# Altium PCB NewBoard.PcbDoc
Units mm, origin at the board's own origin, x right, y up, seen from the top; angles counter-clockwise.
Board outline 132.08 x 179.6 mm, 2 copper layers (Top Layer, Bottom Layer); 63 components, 56 nets, 230 pads, 5 vias.
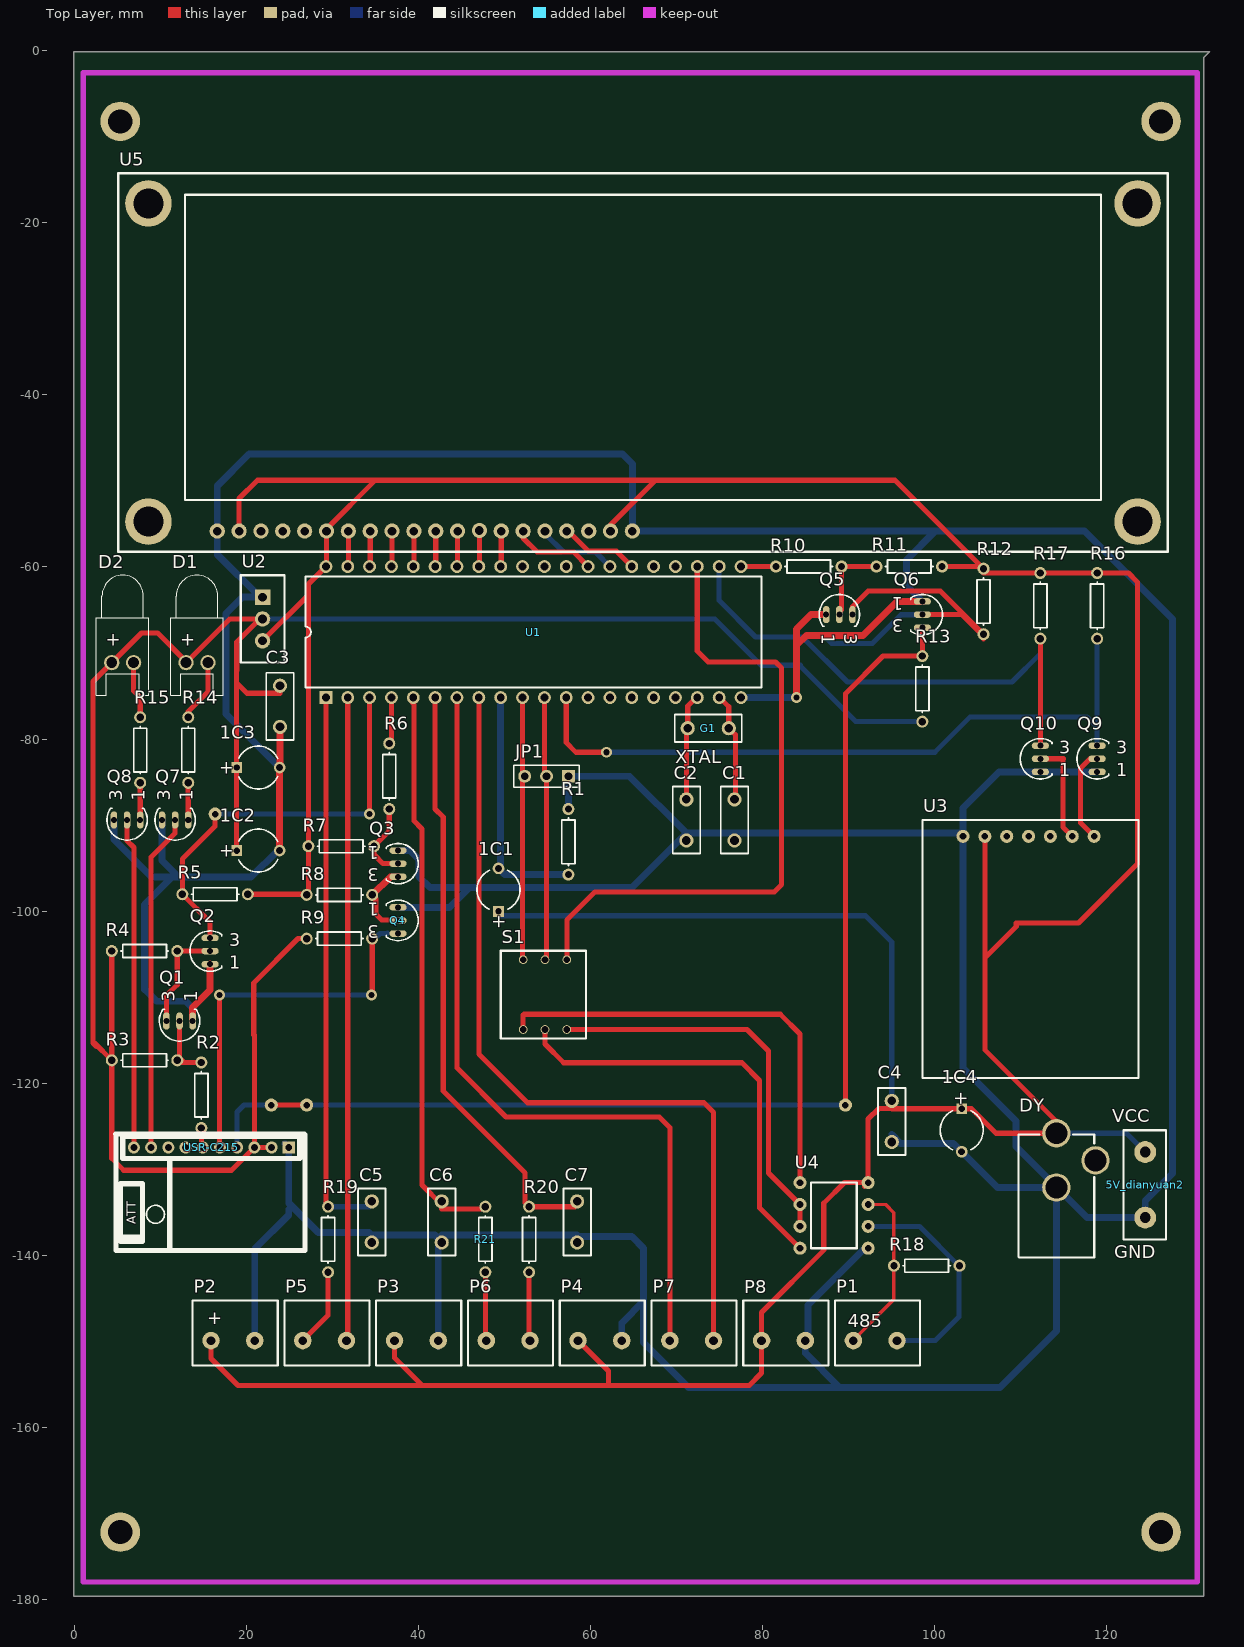
[diagram p0: Top Layer view]
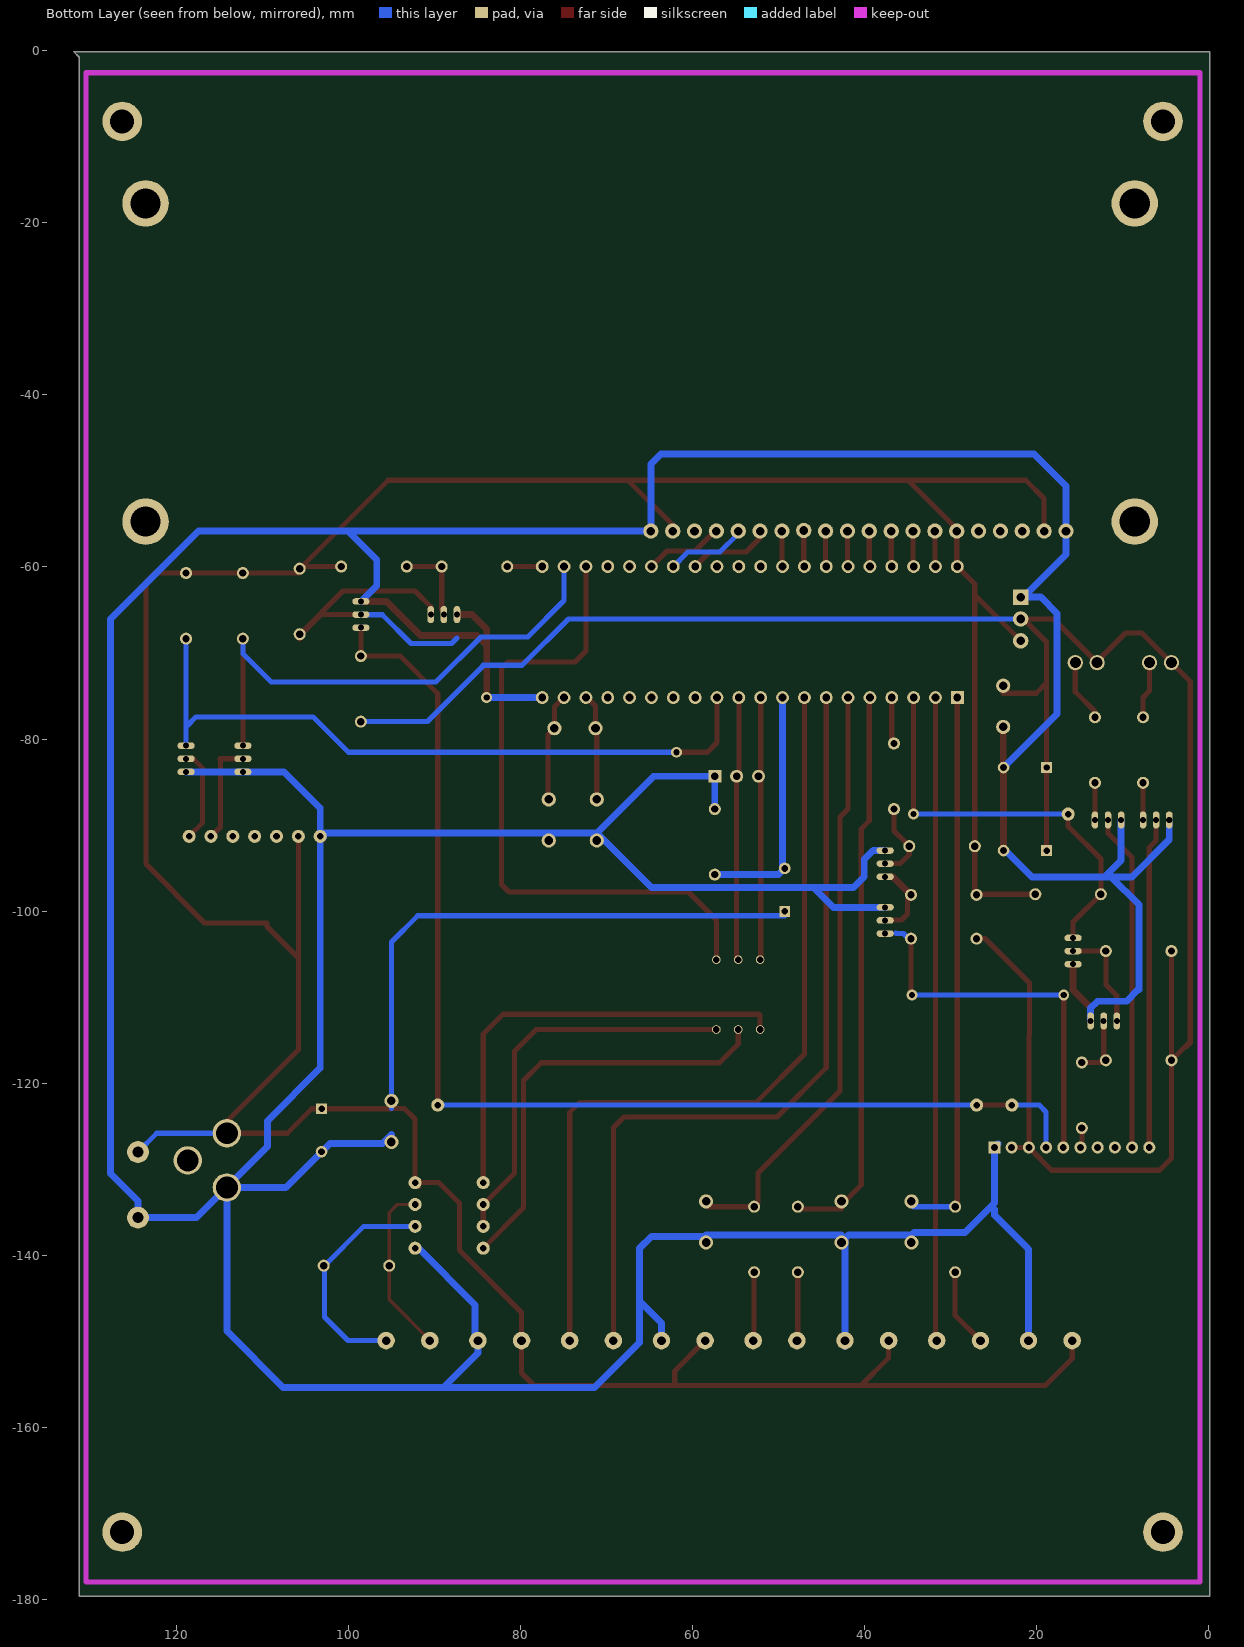
[diagram p1: Bottom Layer view, seen from below]

## Layer stack, top to bottom
Top Layer: signal copper 0.0356
Dielectric: core 0.32, FR-4, Dk 4.8
Bottom Layer: signal copper 0.0356

## Board outline
-0.127,-0.076 131.953,-0.076 131.293,-0.737 131.293,-179.68 -0.127,-179.68

## Design rules (kind name [scope] priority, off if disabled: settings)
Clearance [All] p1: gap=0.2
ComponentClearance [All] p1: gap=0.254 collisioncheckmode=3 verticalgap=0.254
HoleSize [All] p1: absolutevalues=TRUE maxlimit=4 minlimit=0.025 maxpercent=80.000 minpercent=20.000
PolygonConnect [All] p1: connectstyle=Relief reliefconductorwidth=0.254 reliefentries=4 polygonreliefangle="90 Angle"
RoutingVias [All] p1: holewidth=0.6 width=1 viastyle="Through Hole" minholewidth=0.711 minwidth=1.27 maxholewidth=0.711 maxwidth=1.27
SolderMaskExpansion [All] p1: expansion=0.102
TestPointUsage [All] p1: valid=0 allowmultiple=FALSE
Testpoint [All] p1: side=15 testpointundercomponent=TRUE minsize=1.016 maxsize=2.54 preferedsize=1.524 minholesize=0 maxholesize=1.016 preferedholesize=0.813 testpointgrid=0.025 style=1023 order=0123456789
Width [InNet('GND')] p1: maxlimit=0.8 minlimit=0.8 preferedwidth=0.8
17 further rules are at their usual default settings.

## Components (designator, comment, footprint, x,y, rotation, side; value= is the part's Value field where it differs from the comment)
1C1 "Cap Pol1" CAPPR5-5X5 49.276,-97.536 r90 top
1C2 "Cap Pol1" CAPPR5-5X5 21.336,-92.964 r0 top
1C3 "Cap Pol1" CAPPR5-5X5 21.336,-83.312 r0 top
1C4 "Cap Pol1" CAPPR5-5X5 103.124,-125.476 r270 top
5V_dianyuan2 "5V_dianyuan2" 5V_DIANYUAN2 124.46,-128.016 r0 top
C1 "30pF" CAPR5.08-7.8X3.2 76.708,-89.408 r90 top
C2 "104" CAPR5.08-7.8X3.2 71.12,-89.408 r90 top
C3 "104" CAPR5.08-7.8X3.2 23.876,-76.2 r270 top
C4 "104" CAPR5.08-7.8X3.2 94.996,-124.46 r270 top
C5 "104" CAPR5.08-7.8X3.2 34.544,-136.144 r270 top
C6 "104" CAPR5.08-7.8X3.2 42.672,-136.144 r270 top
C7 "104" CAPR5.08-7.8X3.2 58.42,-136.144 r270 top
D1 "LED0" LED-0 14.224,-71.12 r180 top
D2 "LED0" LED-0 5.588,-71.12 r180 top
DY "5V_yuankong" 5V_YUANKONG 109.728,-125.984 r0 top
G1 "XTAL" CAPR5.08-7.8X3.2 73.66,-78.74 r0 top
JP1 "Header 3" HDR1X3 57.404,-84.328 r180 top
P1 "duanzi-2" DUANZI-2 88.392,-145.288 r0 top
P2 "duanzi-2" DUANZI-2 13.716,-145.288 r0 top
P3 "duanzi-2" DUANZI-2 35.052,-145.288 r0 top
P4 "duanzi-2" DUANZI-2 56.388,-145.288 r0 top
P5 "duanzi-2" DUANZI-2 24.384,-145.288 r0 top
P6 "duanzi-2" DUANZI-2 45.72,-145.288 r0 top
P7 "duanzi-2" DUANZI-2 67.056,-145.288 r0 top
P8 "duanzi-2" DUANZI-2 77.724,-145.288 r0 top
Q1 "2N3904" TO-92A 12.192,-112.776 r90 top
Q2 "2N3904" TO-92A 15.748,-104.648 r0 top
Q3 "2N3904" TO-92A 37.592,-94.488 r180 top
Q4 "2N3904" TO-92A 37.592,-101.092 r180 top
Q5 "2N3904" TO-92A 88.9,-65.532 r270 top
Q6 "2N3904" TO-92A 98.552,-65.532 r180 top
Q7 "2N3906" TO-92A 11.684,-89.408 r90 top
Q8 "2N3906" TO-92A 6.096,-89.408 r90 top
Q9 "2N3904" TO-92A 118.872,-82.296 r0 top
Q10 "2N3904" TO-92A 112.268,-82.296 r0 top
R1 "10K" AXIAL-0.3 57.404,-91.948 r90 top
R2 "1K" AXIAL-0.3 14.732,-121.412 r90 top
R3 "1K" AXIAL-0.3 8.128,-117.348 r0 top
R4 "1K" AXIAL-0.3 8.128,-104.648 r0 top
R5 "1K" AXIAL-0.3 16.332,-98.044 r180 top
R6 "1K" AXIAL-0.3 36.576,-84.328 r270 top
R7 "1K" AXIAL-0.3 30.988,-92.456 r0 top
R8 "1K" AXIAL-0.3 30.785,-98.12 r0 top
R9 "1K" AXIAL-0.3 30.785,-103.2 r0 top
R10 "1K" AXIAL-0.3 85.344,-59.944 r0 top
R11 "1K" AXIAL-0.3 97.028,-59.944 r180 top
R12 "1K" AXIAL-0.3 105.664,-64.008 r270 top
R13 "1K" AXIAL-0.3 98.552,-74.168 r90 top
R14 "1K" AXIAL-0.3 13.208,-81.28 r270 top
R15 "1K" AXIAL-0.3 7.62,-81.28 r270 top
R16 "10K" AXIAL-0.3 118.872,-64.516 r270 top
R17 "10K" AXIAL-0.3 112.268,-64.516 r270 top
R18 "120R" AXIAL-0.3 99.06,-141.224 r0 top
R19 "1K" AXIAL-0.3 29.464,-138.176 r270 top
R20 "1K" AXIAL-0.3 52.832,-138.176 r270 top
R21 "1K" AXIAL-0.3 47.752,-138.176 r270 top
S1 "boma-3" BOMA-3 59.436,-114.3 r180 top
U1 "STC12" SOT129-1 53.34,-67.564 r0 top
U2 "LM1117" LM1117 21.844,-63.5 r270 top
U3 "315M_RECV" 315M_RECV 98.552,-89.408 r0 top
U4 "485_test" 485_TEST 84.328,-131.572 r0 top
U5 "16032zwa" 16032ZWA 5.08,-14.224 r0 top
USR-C215 "USR-C215" DIP2.0*1-10-M 24.892,-127.508 r90 top

## Footprints (in the part's own frame and the unit in brackets; to place one, negate y for a bottom-side part, rotate by r counter-clockwise, add the part's x,y. Pads: shape width x height; smd on the part's side, far side on the other; paste and mask are expansions set on the pad)
5V_DIANYUAN2 [mm]
  round 2.54 hole 1.27: 1(0,0) 2(0,-7.62)
  silkscreen extent -2.54,-10.16 2.41,2.54
5V_YUANKONG [mm]
  round 3.302 hole 2.54: 1(4.4,0.15) 2(4.4,-6.15) 3(8.95,-3)
  silkscreen extent 0,-14.3 8.8,0
315M_RECV [mil]
  round 60 hole 30: 1(186,-75) 2(286,-75) 3(386,-75) 4(486,-75) 5(586,-75) 6(686,-75) 7(786,-75)
  silkscreen extent 0,-1181 990,0
485_TEST [mil]
  round 60 hole 30: 1(0,0) 2(0,-100) 3(0,-200) 4(0,-300) 5(311.81,-300) 6(311.81,-200) 7(311.81,-100) 8(311.81,0)
  silkscreen extent 50,-300 260,0
16032ZWA [mm]
  round 1.778 hole 1: 1(59.76,-41.6) 2(57.22,-41.6) 3(54.68,-41.6) 4(52.14,-41.6) 5(49.6,-41.6) 6(47.06,-41.6) 7(44.52,-41.6) 8(41.98,-41.529) 9(39.44,-41.6) 10(36.9,-41.6) 11(34.36,-41.6) 12(31.82,-41.6) 13(29.28,-41.6) 14(26.74,-41.6) 15(24.2,-41.6) 16(21.66,-41.6) 17(19.12,-41.6) 18(16.58,-41.6) 19(14.04,-41.6) 20(11.5,-41.6)
  round 5.4 hole 3.5: 21(3.5,-3.5) 21(118.5,-40.5) 22(118.5,-3.5) 23(3.5,-40.5)
  silkscreen extent 0,-44 122,0
AXIAL-0.3 [mm] "Resistor; 2 Leads"
  round 1.4 hole 0.85: 1(-3.81,0) 2(3.81,0)
  silkscreen extent -2.77,-0.76 2.77,0.76
BOMA-3 [mm]
  round 1 hole 0.762: 1(2.215,-8.65) 2(4.755,-8.65) 3(7.295,-8.65) 4(7.295,-0.53) 5(4.755,-0.53) 6(2.215,-0.53)
  silkscreen extent 0,-9.69 9.9,0.51
CAPPR5-5X5 [mm]
  rect 1.25x1.25 hole 0.75: 1(-2.5,0)
  round 1.35 hole 0.8: 2(2.5,0)
  silkscreen extent -2.26,-2.5 2.27,2.5
CAPR5.08-7.8X3.2 [mm]
  round 1.65 hole 1: 1(-2.39,0) 2(2.39,0)
  silkscreen extent -3.9,-1.6 3.9,1.6
DIP2.0*1-10-M [mil]
  rect 55x55 hole 31.5: 1(1,0)
  round 55 hole 31.5: 2(1,78.74) 3(1,157.48) 4(1,236.22) 5(1,314.96) 6(1,393.7) 7(1,472.44) 8(1,551.18) 9(1,629.92) 10(1,708.66)
  silkscreen extent -470,-75 63,792
DUANZI-2 [mil]
  round 80 hole 40: 1(84.25,-183.07) 2(284.25,-183.07)
  silkscreen extent 0,-297 390,0
HDR1X3 [mm] "Connector; Header; 3 Position"
  rect 1.5x1.5 hole 0.9: 1(0,0)
  round 1.5 hole 0.9: 2(2.54,0) 3(5.08,0)
  silkscreen extent -1.27,-1.27 6.35,1.27
LED-0 [mil] "Typical INFRARED GaAs LED; 2 Leads"
  round 70 hole 50: 1(50,0) 2(-50,0)
  silkscreen extent -120,-400 120,150
LM1117 [mm]
  rect 1.8x1.8 hole 1: 1(0,0)
  round 1.8 hole 1: 2(2.54,0) 3(5.08,0)
  silkscreen extent -2.54,-2.54 7.62,2.54
SOT129-1 [mm] "DIP; 40 Leads; Row Spacing 15.24 mm; Pitch 2.54 mm"
  rect 1.5x1.5 hole 0.9: 1(-24.13,-7.62)
  round 1.5 hole 0.9: 2(-21.59,-7.62) 3(-19.05,-7.62) 4(-16.51,-7.62) 5(-13.97,-7.62) 6(-11.43,-7.62) 7(-8.89,-7.62) 8(-6.35,-7.62) 9(-3.81,-7.62) 10(-1.27,-7.62) 11(1.27,-7.62) 12(3.81,-7.62) 13(6.35,-7.62) 14(8.89,-7.62) 15(11.43,-7.62) 16(13.97,-7.62) 17(16.51,-7.62) 18(19.05,-7.62) 19(21.59,-7.62) 20(24.13,-7.62) 21(24.13,7.62) 22(21.59,7.62) 23(19.05,7.62) 24(16.51,7.62) 25(13.97,7.62) 26(11.43,7.62) 27(8.89,7.62) 28(6.35,7.62) 29(3.81,7.62) 30(1.27,7.62) 31(-1.27,7.62) 32(-3.81,7.62) 33(-6.35,7.62) 34(-8.89,7.62) 35(-11.43,7.62) 36(-13.97,7.62) 37(-16.51,7.62) 38(-19.05,7.62) 39(-21.59,7.62) 40(-24.13,7.62)
  silkscreen extent -26.5,-6.45 26.5,6.45
TO-92A [mm] "TO, Flat Index; 3 In-Line, Axial Leads; Body Dia. 4.6mm; Leads 0.41 x 0.39 mm (max)"
  oval 2x0.762 hole 0.7: 1(0,-1.524) 2(0,0) 3(0,1.524)
  silkscreen extent -2.34,-2.34 1.35,2.34

## Part data
1C1 1C2 1C3 1C4: "Polarized Capacitor (Radial)"
C1 C2 C3 C4 C5 C6 C7: library part Cap, "Capacitor"
D1 D2: "Typical INFRARED GaAs LED"
G1: "Crystal Oscillator"
JP1: "Header, 3-Pin"
P1 P2 P3 P4 P5 P6 P7 P8: "Header, 2-Pin"
Q1 Q2 Q3 Q4 Q5 Q6 Q9 Q10: "NPN General Purpose Amplifier"
Q7 Q8: "PNP General Purpose Amplifier"
R1 R2 R3 R4 R5 R6 R7 R8 R9 R10 R11 R12 R13 R14 R15 R16 R17 R18 R19 R20 R21: library part Res2, "Resistor"
S1: "DIP Switch"
U1: library part P89C51RD2BN/01, "80C51 8-Bit Flash Microcontroller Family, 64 kB ISP/IAP Flash with 1 kB RAM."
U4: "Header, 4-Pin, Dual row"
U5: "Header, 20-Pin"

## Free pads (board coordinates)
  round 4.6 hole 2.8: 0(5.3,-172.2) 0(5.3,-8.2) 0(126.3,-172.2) 1(126.3,-8.2)
  round 1.524 hole 0.762: 0(16.332,-88.722) 6(22.86,-122.555) 7(26.975,-122.555) 8(89.611,-122.555)

## Via types
v1: diameter 1.27, hole 0.711, Top Layer to Bottom Layer, 5 vias

## Nets (pads, with @x,y where several pads share a name; then routed paths per layer and width w, separated by ;. In a path a pad name is that pad's centre, name@x,y a point inside that pad or via, vN(x,y) a via of type N, cw(c..) or ccw(c..) an arc to the next point about the centre after c; other vN are vias at no path point)
3.3V: 1C2.1 1C3.1 C3.1 D1.1 D2.1 R3.1 R4.1 R9.1 R13.1 U2.2 USR-C215.2 USR-C215.3 | length 258.1
  Top Layer w0.6: 2.54,-115.748 2.134,-115.341 ; R3.1 2.311,-115.341 2.134,-115.341 ; R4.1 4.318,-128.727 5.715,-130.124 18.25,-130.124 USR-C215.3 ; 1C2.1 18.836,-72.034 ; 18.836,-73.482 20.03,-74.676 23.876,-74.676 ; 18.847,-72.024 18.847,-68.707 U2.2@21.514,-66.04 ; U2.2 18.034,-66.04 13.157,-70.917 12.903,-70.917 9.652,-67.666 7.772,-67.666 2.134,-73.304 2.134,-115.341 ; USR-C215.2 USR-C215.3 ; R9.1 25.984,-103.2 20.828,-108.356 20.828,-114.376 20.892,-114.44 USR-C215.3
  Bottom Layer w0.6: U2.2 74.422,-66.04 79.807,-71.425 84.353,-71.425 84.353,-71.526 90.805,-77.978 R13.1
13: Q10.2 U3.6 | length 12.2
  Top Layer w0.6: Q10.2 114.935,-82.296 114.884,-82.347 114.884,-90.221 U3.6
315M_TEST: Q10.3 R17.2 U1.22 | length 60.8
  Top Layer w0.6: Q10.3 R17.2
  Bottom Layer w0.6: U1.22 74.93,-63.906 79.146,-68.123 84.582,-68.123 89.84,-73.381 108.966,-73.381 112.268,-70.079 R17.2
485_CONTROL: S1.1 U1.23 | length 77.3
  Top Layer w0.6: S1.1 57.221,-101.046 60.477,-97.79 81.331,-97.79 82.194,-96.926 82.194,-71.755 81.483,-71.044 73.66,-71.044 72.39,-69.774 U1.23 U1.23@72.39,-59.512
DB0: U1.32 U5.7 | length 4
  Top Layer w0.6: U1.32@49.6,-59.874 U5.7
DB1: U1.33 U5.8 | length 4.1
  Top Layer w0.6: U1.33@47.06,-59.874 U5.8
DB2: U1.34 U5.9 | length 4
  Top Layer w0.6: U1.34@44.52,-59.874 U5.9
DB3: U1.35 U5.10 | length 4
  Top Layer w0.6: U1.35@41.98,-59.874 U5.10
DB4: U1.36 U5.11 | length 4
  Top Layer w0.6: U1.36@39.44,-59.874 U5.11
DB5: U1.37 U5.12 | length 4
  Top Layer w0.6: U1.37@36.9,-59.874 U5.12
DB6: U1.38 U5.13 | length 4
  Top Layer w0.6: U1.38@34.36,-59.874 U5.13
DB7: U1.39 U5.14 | length 4
  Top Layer w0.6: U1.39@31.82,-59.874 U5.14
GND: 1C2.2 1C3.2 1C4.2 5V_dianyuan2.2 C1.1 C2.1 C3.2 C4.2 C5.2 C6.2 C7.2 DY.2 JP1.1 P2.2 P3.2 P4.2 P8.2 Q1.1 Q2.1 Q3.1 Q4.1 Q5.1 Q6.1 Q7.3 Q8.3 Q9.1 Q10.1 R1.2 U1.20 U2.1 U3.1 U4.5 U5.1 U5.20 USR-C215.1 | length 744.7
  Top Layer w0.8: Q1.1 13.716,-111.209 15.748,-109.177 Q2.1 ; 1C2.2 1C3.2 ; 1C3.2@23.876,-83.272 C3.2 ; v1(83.922,-75.184) 83.922,-67.234 85.623,-65.532 Q5.1 ; 83.922,-69.088 85.065,-67.945 91.643,-67.945 95.58,-64.008 Q6.1
  Bottom Layer w0.8: Q8.3 4.572,-91.694 8.915,-96.037 20.523,-96.037 1C2.2@23.622,-92.939 ; Q7.3 10.16,-94.107 12.09,-96.037 ; 11.328,-96.037 8.103,-99.263 8.103,-109.144 8.204,-109.144 9.55,-110.49 12.929,-110.49 13.716,-111.277 Q1.1 ; P2.2 20.936,-139.313 24.892,-135.357 24.892,-134.664 ; U2.1@21.539,-63.5 16.58,-58.541 16.58,-50.578 20.295,-46.863 63.678,-46.863 64.84,-48.025 U5.1 116.032,-55.824 116.038,-55.829 117.399,-55.829 127.635,-66.065 127.635,-130.531 124.46,-133.706 5V_dianyuan2.2@124.46,-135.331 ; U2.1 19.507,-63.5 17.602,-65.405 17.602,-77.078 1C3.2@23.876,-83.352 ; USR-C215.1@24.46,-127.051 USR-C215.1 24.892,-133.934 28.321,-137.363 34.239,-137.363 34.544,-137.668 41.872,-137.668 42.272,-138.068 P3.2@42.272,-150.628 ; Q4.1 43.561,-99.568 ; Q3.1 38.989,-92.964 40.03,-94.005 40.03,-96.012 41.3,-97.282 64.77,-97.282 71.12,-90.932 ; 42.672,-137.668 58.42,-137.668 58.572,-137.82 64.77,-137.82 66.148,-139.198 66.148,-150.146 71.374,-155.372 107.594,-155.372 114.128,-148.838 DY.2 107.282,-132.134 102.148,-127 96.012,-127 94.996,-125.984 ; 43.599,-99.606 45.923,-97.282 ; R1.2 JP1.1 64.516,-84.328 71.12,-90.932 ; P4.2 63.608,-147.879 66.148,-145.339 ; U1.20 v1(83.922,-75.184) ; P8.2 84.944,-151.39 88.925,-155.372 ; P8.2@85.268,-149.614 85.268,-145.796 91.872,-139.192 U4.5 ; Q6.1 96.698,-62.154 96.698,-59.177 100.051,-55.824 ; U3.1@102.906,-91.415 U3.1@103.022,-91.415 ; U3.1@103.276,-90.932 71.12,-90.932 ; DY.2@114.128,-132.086 109.423,-127.381 109.423,-124.384 103.276,-118.237 103.276,-88.011 107.467,-83.82 Q9.1 ; DY.2@114.176,-132.134 117.678,-135.636 5V_dianyuan2.2
INT0: Q9.3 R16.2 U1.12 | length 81.8
  Top Layer w0.6: U1.12 57.15,-80.416 58.268,-81.534 v1(61.849,-81.534)
  Bottom Layer w0.6: v1(61.849,-81.534) 100,-81.534 104.115,-77.419 117.704,-77.419 118.694,-78.41 ; Q9.3 R16.2
Net1C1_2: 1C1.2 R1.1 U1.9 | length 28.2
  Bottom Layer w0.8: U1.9 49.53,-95.29 49.998,-95.758 R1.1
NetC1_2: C1.2 G1.2 U1.19 | length 12.7
  Top Layer w0.6: U1.19 74.981,-75.184 76.05,-76.253 G1.2 76.81,-79.5 76.81,-86.916 C1.2
NetC2_2: C2.2 G1.1 U1.18 | length 12.3
  Top Layer w0.6: C2.2 G1.1@71.12,-78.842 ; G1.1 71.27,-76.177 72.263,-75.184 U1.18
NetC5_1: C5.1 R19.1 U1.1 | length 64.1
  Top Layer w0.6: U1.1 29.21,-134.112 R19.1
  Bottom Layer w0.6: R19.1 C5.1@34.29,-134.366
NetC6_1: C6.1 R21.1 U1.5 | length 65.2
  Top Layer w0.6: U1.5@39.294,-75.828 U1.5@39.294,-74.955 ; 39.446,-75.98 39.446,-89.51 40.386,-90.449 40.386,-131.851 C6.1@42.672,-134.137 ; 42.672,-134.62 R21.1@47.498,-134.62
NetC7_1: C7.1 R20.1 U1.6 | length 68.4
  Top Layer w0.6: U1.6 41.91,-88.138 42.85,-89.078 42.85,-120.929 52.375,-130.454 R20.1@52.375,-133.909 ; R20.1 C7.1@58.166,-134.366
NetD1_2: D1.2 R14.1 | length 6.6
  Top Layer w0.6: R14.1@13.208,-76.784 15.494,-74.498 D1.2
NetD2_2: D2.2 R15.1 | length 6.7
  Top Layer w0.6: D2.2 6.858,-74.397 7.62,-75.159 R15.1
NetP1_1: P1.1 R18.1 U4.7 | length 20.2
  Top Layer w0.4: P1.1@90.532,-149.879 95.25,-145.161 95.25,-135.052 94.31,-134.112 U4.7
NetP1_2: P1.2 R18.2 U4.6 | length 26.7
  Bottom Layer w0.6: U4.6 98.222,-136.652 102.794,-141.224 102.794,-147.193 100.049,-149.938 P1.2
NetP5_1: P5.1 R19.2 | length 9.2
  Top Layer w0.6: P5.1 29.464,-146.998 R19.2
NetP5_2: P5.2 U1.2 | length 74
  Top Layer w0.6: P5.2@31.75,-149.182 U1.2
NetP6_1: P6.1 R21.2 | length 7.8
  Top Layer w0.6: P6.1@47.752,-149.83 R21.2
NetP6_2: P6.2 R20.2 | length 7.8
  Top Layer w0.6: P6.2@52.832,-149.83 R20.2
NetP7_1: P7.1 U1.7 | length 95.4
  Top Layer w0.6: U1.7 44.45,-118.212 50.165,-123.927 67.97,-123.927 69.196,-125.152 P7.1
NetP7_2: P7.2 U1.8 | length 98.1
  Top Layer w0.6: U1.8 46.99,-116.611 52.654,-122.276 73.152,-122.276 74.276,-123.4 P7.2
NetQ1_2: Q1.2 R2.2 R3.2 | length 7.6
  Top Layer w0.6: R3.2@12.192,-117.602 R2.2 ; Q1.2 12.192,-117.094 12.7,-117.602
NetQ1_3: Q1.3 Q2.2 R4.2 | length 12.5
  Top Layer w0.6: Q1.3 10.668,-109.83 11.938,-108.56 R4.2 Q2.2
NetQ3_2: Q3.2 R6.2 R7.2 | length 8.8
  Top Layer w0.6: R7.2 34.798,-93.421 35.865,-94.488 Q3.2 ; R7.2@35.154,-92.1 36.576,-90.678 R6.2
NetQ3_3: Q3.3 Q4.2 R8.2 | length 8.6
  Top Layer w0.6: R8.2@35.001,-98.527 35.001,-100.33 35.712,-101.041 37.516,-101.041 37.567,-101.092 Q4.2
  Top Layer w0.8: R8.2 36.703,-96.012 Q3.3
NetQ5_2: Q5.2 R10.2 R11.2 | length 9.1
  Top Layer w0.6: Q5.2@89.154,-64.999 R10.2 R11.2
NetQ5_3: Q5.3 Q6.2 R12.2 | length 40.1
  Top Layer w0.6: Q5.3 90.424,-64.618 92.253,-62.789 100.635,-62.789 R12.2 ; Q6.2 103.175,-65.532 R12.2@105.664,-68.021 ; R12.2@105.664,-68.351 R12.2@105.664,-68.326
  Bottom Layer w0.6: 87.376,-68.25 88.011,-68.885 92.735,-68.885 96.063,-65.557 98.374,-65.557 98.476,-65.456 Q6.2@98.273,-65.456
NetQ7_1: Q7.1 R14.2 | length 4.3
  Top Layer w0.6: Q7.1 R14.2
NetQ8_1: Q8.1 R15.2 | length 4.3
  Top Layer w0.6: Q8.1 R15.2
NetS1_4: S1.4 U4.1 | length 52.2
  Top Layer w0.6: S1.4 52.141,-112.095 52.248,-111.989 82.042,-111.989 84.328,-114.275 U4.1
NetS1_5: S1.5 U4.4 | length 49.8
  Top Layer w0.6: S1.5 54.681,-115.438 56.871,-117.627 77.572,-117.627 79.629,-119.685 79.629,-134.493 U4.4
NetS1_6: S1.6 U4.2 U4.3 | length 46.4
  Top Layer w0.6: S1.6 78.159,-113.77 80.67,-116.281 80.67,-130.454 U4.2 U4.3
NetU1_26: U1.26 U5.4 | length 9.3
  Top Layer w0.6: U5.4 57.22,-55.925 57.499,-55.925 59.715,-58.141 62.967,-58.141 U1.26
NetU1_27: U1.27 U5.5 | length 9.6
  Bottom Layer w0.6: U5.5 54.68,-56.128 56.82,-58.268 60.554,-58.268 U1.27@62.332,-60.046
NetU1_28: U1.28 U5.6 | length 9.7
  Top Layer w0.6: U5.6 52.14,-56.636 53.772,-58.268 58.014,-58.268 U1.28
NLINK: Q8.2 USR-C215.10 | length 37.8
  Top Layer w0.6: Q8.2 6.096,-91.821 6.892,-92.617 USR-C215.10@6.892,-126.905
READY: Q7.2 USR-C215.9 | length 38.7
  Top Layer w0.6: USR-C215.9@8.892,-126.905 8.892,-93.749 11.684,-90.957 Q7.2
RESET: pad.6 pad.7 pad.8 Q6.3 R13.2 USR-C215.4 | length 137.1
  Top Layer w0.6: pad.6 pad.7 ; pad.8 89.611,-74.727 93.98,-70.358 R13.2 Q6.3
  Bottom Layer w0.6: USR-C215.4 18.892,-123.348 19.685,-122.555 pad.6 ; pad.7 pad.8
RXD: JP1.3 S1.3 U1.10 | length 30.4
  Top Layer w0.6: S1.3@52.07,-105.579 U1.10
RXD2: pad.0@16.332,-88.722 Q2.3 R5.2 U1.3 | length 48.8
  Top Layer w0.6: Q2.3 15.748,-101.27 R5.2 12.522,-93.955 16.332,-90.145 pad.0@16.332,-88.722 ; v1(34.29,-88.722) U1.3
  Bottom Layer w0.6: pad.0@16.332,-88.722 v1(34.29,-88.722)
TXD: JP1.2 S1.2 U1.11 | length 30.3
  Top Layer w0.6: JP1.2@54.61,-84.074 U1.11 ; S1.2 54.864,-105.467 JP1.2
TXD2: R6.1 U1.4 | length 5.1
  Top Layer w0.6: R6.1@36.83,-80.264 U1.4
UART_RX: Q4.3 R9.2 USR-C215.5 | length 43.8
  Top Layer w0.6: USR-C215.5@16.688,-127.356 16.765,-127.356 16.84,-127.28 v1(16.84,-109.753) ; v1@34.595,-109.576 R9.2
  Bottom Layer w0.6: v1(16.84,-109.753) v1(34.493,-109.753) ; R9.2 34.9,-103.2 35.484,-102.616 36.319,-102.616 36.37,-102.565
UART_TX: R2.1 USR-C215.6 | length 1.7
  Top Layer w0.6: USR-C215.6@14.732,-126.905 R2.1
VCC: 1C1.1 1C4.1 5V_dianyuan2.1 C4.1 DY.1 P2.1 P3.1 P4.1 P8.1 R5.1 R7.1 R8.1 R11.1 R12.1 R16.1 R17.1 U1.40 U2.3 U3.2 U4.8 U5.2 U5.15 U5.19 | length 502.6
  Top Layer w0.6: P2.1 15.856,-152 18.999,-155.143 78.435,-155.143 79.864,-153.714 79.864,-146.653 87.097,-139.421 87.097,-133.96 89.484,-131.572 U4.8 ; U5.19 19.12,-52.051 21.26,-49.911 95.377,-49.911 R12.1 ; R5.1 R8.1@26.899,-98.044 ; U2.3 27.178,-63.246 ; R8.1@27.178,-97.917 27.178,-61.976 U1.40 U1.40@28.981,-59.944 ; U1.40@29.28,-59.874 29.28,-55.581 34.95,-49.911 ; P3.1 37.192,-151.924 40.411,-155.143 ; P4.1 62.052,-153.462 62.052,-155.143 ; U5.2 62.3,-55.124 67.513,-49.911 ; U4.8@91.816,-132.004 U4.8 ; 94.996,-122.936 93.497,-122.936 92.248,-124.185 U4.8 ; 95.036,-122.976 104.256,-122.976 107.114,-125.834 DY.1 ; R11.1 104.902,-59.944 ; R12.1@105.664,-60.706 122.504,-60.706 123.546,-61.747 123.546,-94.539 116.713,-101.371 109.474,-101.371 109.474,-101.803 105.816,-105.461 ; U3.2 105.816,-116.129 DY.1@114.128,-124.44
  Bottom Layer w0.6: 1C1.1@49.276,-100.544 91.933,-100.544 94.996,-103.607 94.996,-122.936 ; DY.1 122.278,-125.834 5V_dianyuan2.1
VT: Q9.2 U3.7 | length 11
  Top Layer w0.6: U3.7 116.942,-89.738 116.942,-83.388 118.034,-82.296 Q9.2
WIFI_RESET: R10.1 U1.21 | length 4.1
  Top Layer w0.6: U1.21 R10.1
pads on no net: DY.3 U1.13 U1.14 U1.15 U1.16 U1.17 U1.24 U1.25 U1.29 U1.30 U1.31 U3.3 U3.4 U3.5 U5.3 U5.16 U5.17 U5.18 U5.21 U5.22 U5.23 USR-C215.7 USR-C215.8

## Keep-outs
Keep-Out Layer:
  lines w0.6: 1,-178 1,-2.54 130.5,-2.54 130.5,-178 1,-178

## Silkscreen, mask and mechanical layers (free items; w line width, h text height)
Top Overlay:
  text "+" at 3.632,-69.139 h1.52
  text "+" at 12.294,-69.139 h1.52
  text "VCC" at 120.599,-124.536 h1.52
  text "GND" at 120.879,-140.386 h1.52
  text "+" at 15.443,-148.006 h1.52
  text "485" at 89.865,-148.387 h1.52

## Text inside footprints (layer, text, board x,y; h text height)
1C1: Top Overlay "+" at 50.026,-102.086 h1.5 r90
1C2: Top Overlay "+" at 16.786,-93.714 h1.5
1C3: Top Overlay "+" at 16.786,-84.062 h1.5
1C4: Top Overlay "+" at 102.374,-120.926 h1.5 r270
Q1: Top Overlay "3" at 11.632,-110.552 h1.5 r90; Top Overlay "1" at 14.227,-110.552 h1.5 r90
Q2: Top Overlay "1" at 17.972,-106.683 h1.5; Top Overlay "3" at 17.972,-104.088 h1.5
Q3: Top Overlay "3" at 35.368,-95.048 h1.5 r180; Top Overlay "1" at 35.368,-92.453 h1.5 r180
Q4: Top Overlay "1" at 35.368,-99.057 h1.5 r180; Top Overlay "3" at 35.368,-101.652 h1.5 r180
Q5: Top Overlay "3" at 89.46,-67.756 h1.5 r270; Top Overlay "1" at 86.865,-67.756 h1.5 r270
Q6: Top Overlay "1" at 96.328,-63.497 h1.5 r180; Top Overlay "3" at 96.328,-66.092 h1.5 r180
Q7: Top Overlay "3" at 11.124,-87.184 h1.5 r90; Top Overlay "1" at 13.719,-87.184 h1.5 r90
Q8: Top Overlay "1" at 8.131,-87.184 h1.5 r90; Top Overlay "3" at 5.536,-87.184 h1.5 r90
Q9: Top Overlay "3" at 121.096,-81.736 h1.5; Top Overlay "1" at 121.096,-84.331 h1.5
Q10: Top Overlay "1" at 114.492,-84.331 h1.5; Top Overlay "3" at 114.492,-81.736 h1.5
USR-C215: Top Overlay "ATT" at 7.112,-136.398 h1.02 r90